# Altium PCB GPS.PcbDoc
Units mm, origin at the board's own origin, x right, y up, seen from the top; angles counter-clockwise.
Board outline 29 x 59 mm, 4 copper layers (Top Layer, MidLayer1, GroundPlane, Bottom Layer); 77 components, 84 nets, 473 pads, 152 vias.
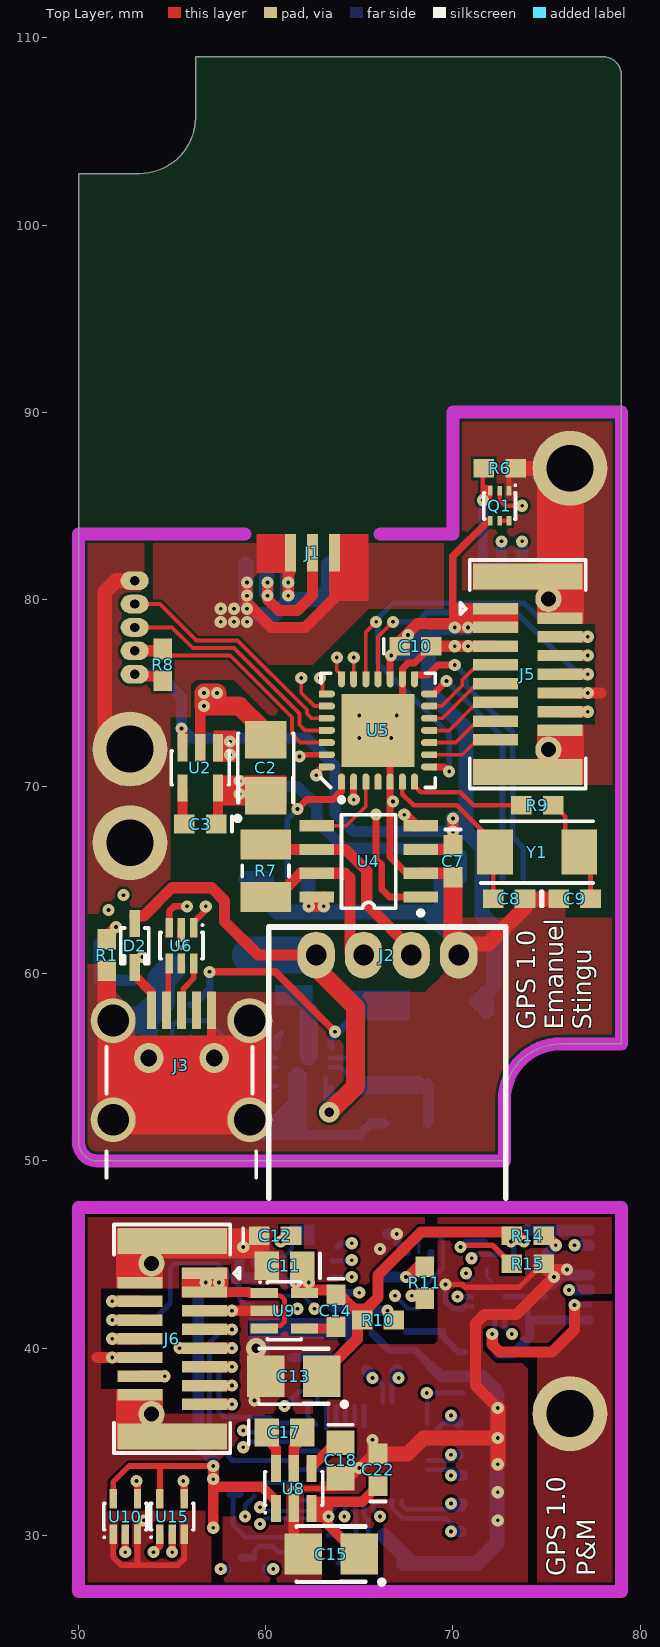
[diagram p0: Top Layer view]
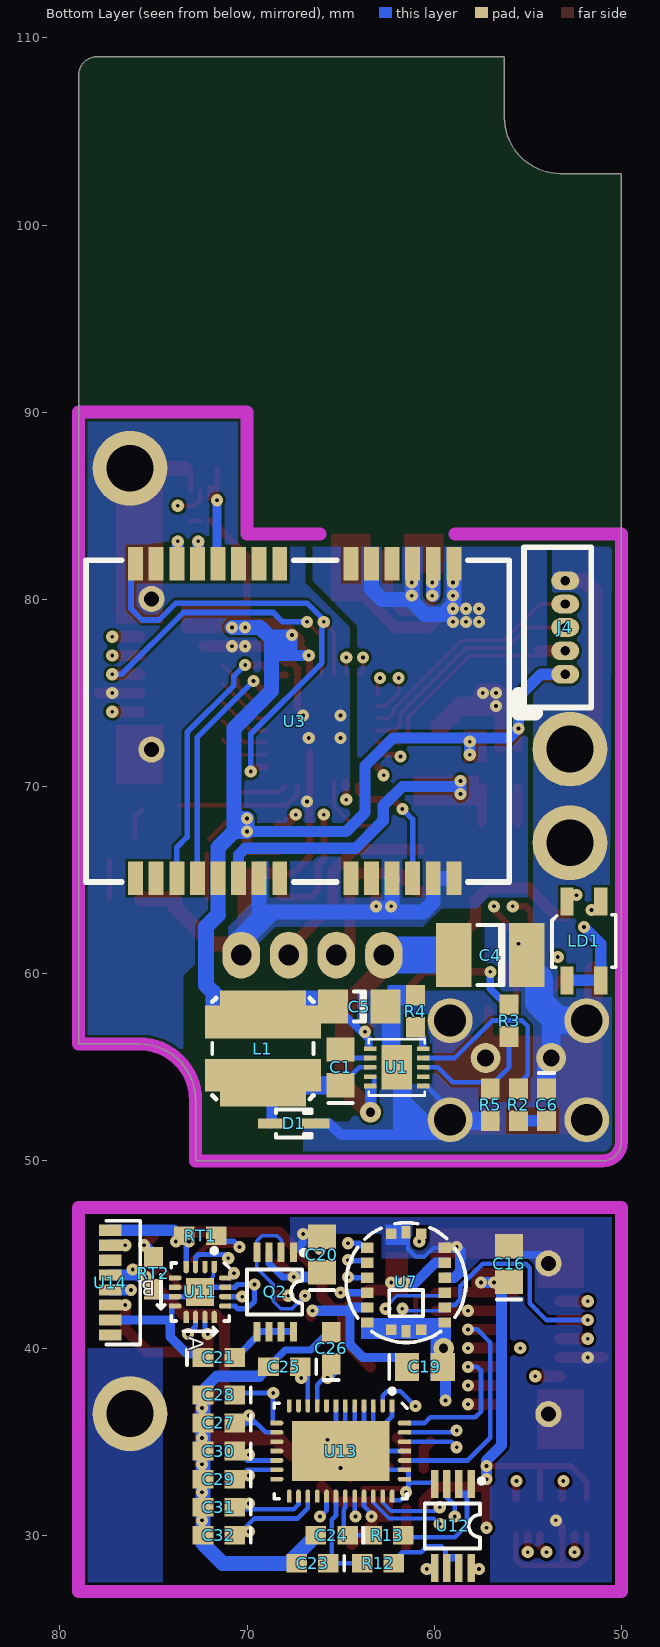
[diagram p1: Bottom Layer view, seen from below]
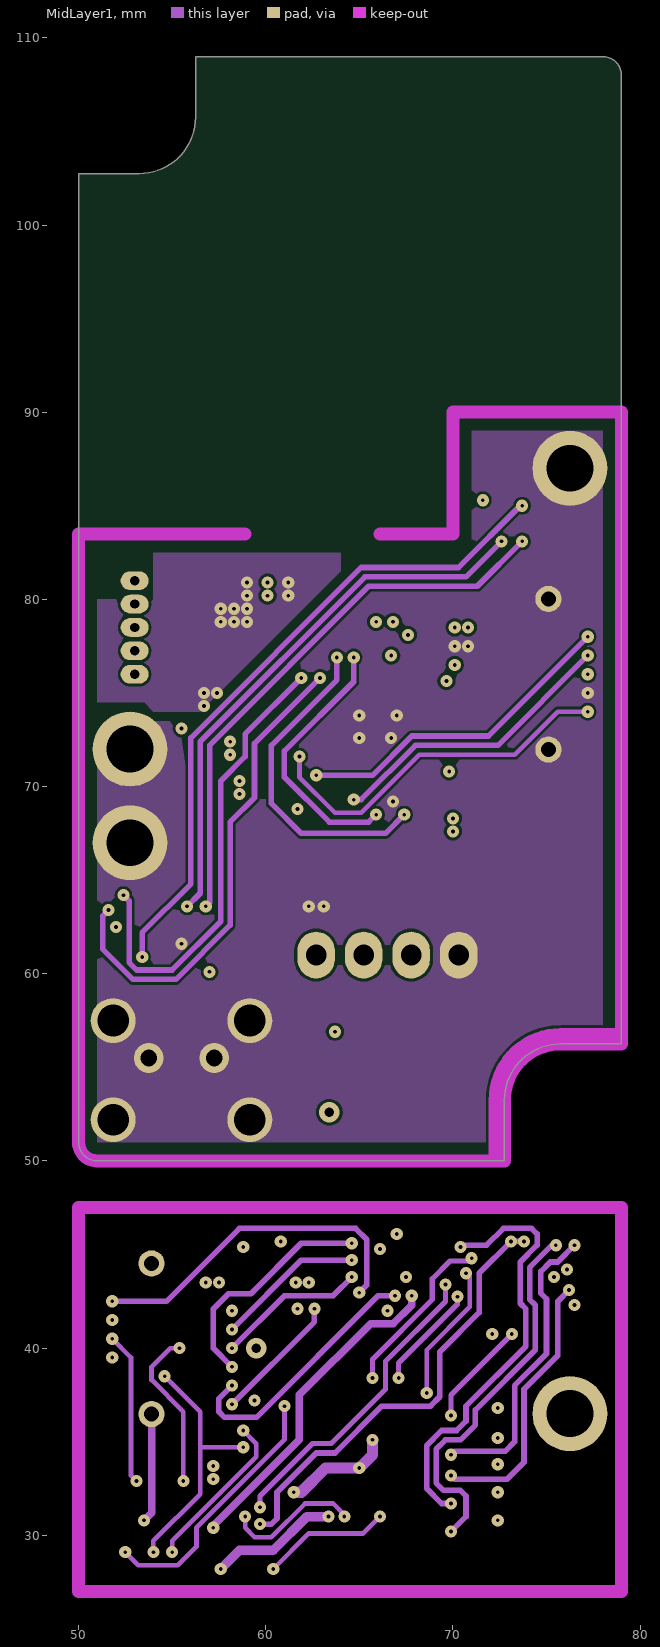
[diagram p2: MidLayer1]
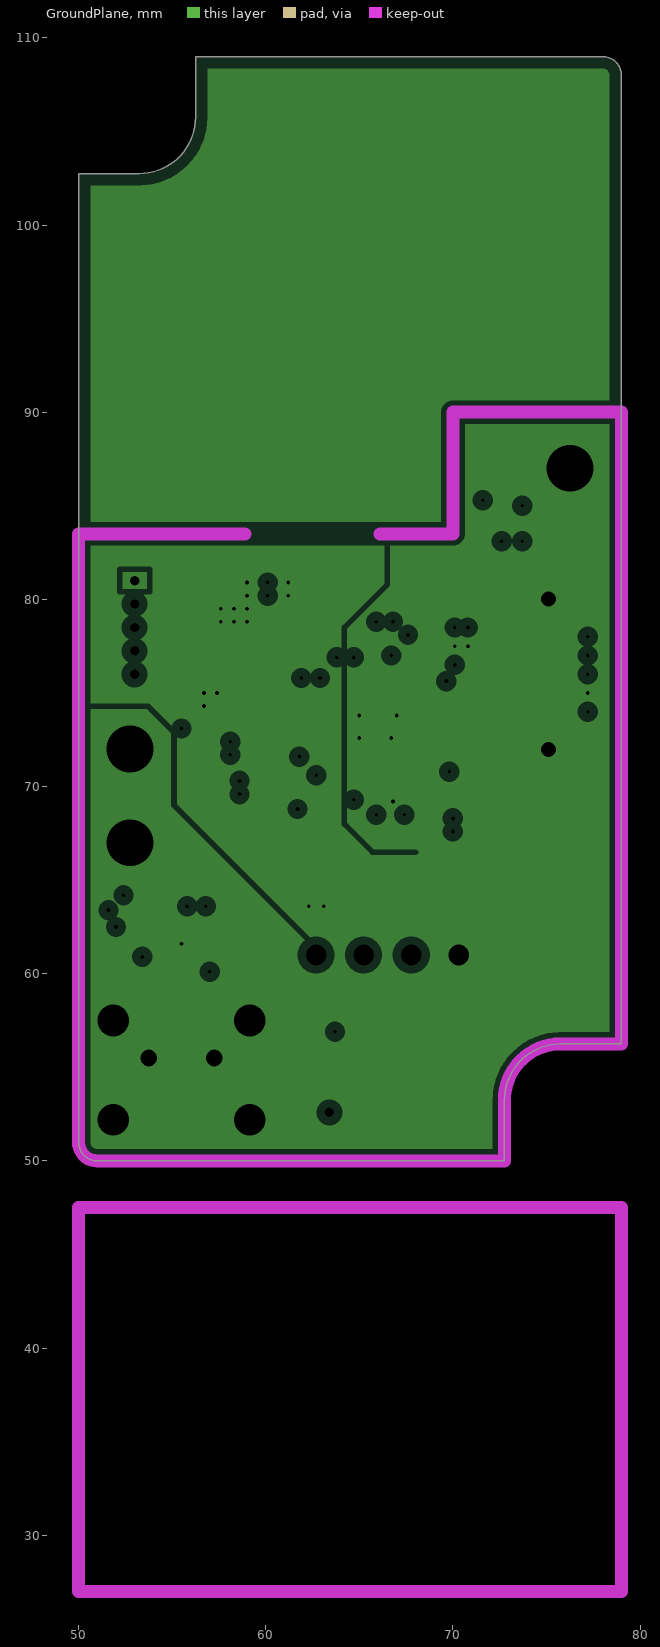
[diagram p3: GroundPlane, clearances drawn from the general rule]

## Layer stack, top to bottom
Top Layer: signal copper 0.036
Dielectric: prepreg 0.32, FR-4, Dk 4.8
MidLayer1: signal copper 0.036
Dielectric: core 0.32, FR-4, Dk 4.8
GroundPlane: plane copper 0.036, net GND
Dielectric: prepreg 0.32, FR-4, Dk 4.8
Bottom Layer: signal copper 0.036

## Board outline
50,51 50,102.75 53.25,102.75 ccw(c53.25,105.75) 56.25,105.75 56.25,109 78,109 cw(c78,108) 79,108 79,56.25 75.75,56.25 ccw(c75.75,53.25) 72.75,53.25 72.75,50 51,50 cw(c51,51)

## Design rules (kind name [scope] priority, off if disabled: settings)
Clearance [All] p1: gap=0.152
ComponentClearance [All] p1 off: gap=0.254 collisioncheckmode=3 verticalgap=0.254
HoleSize [All] p1: absolutevalues=TRUE maxlimit=4 minlimit=0.2 maxpercent=80.000 minpercent=20.000
PlaneClearance [All] p1: clearance=0.445
PlaneConnect [All] p1: planeconnectstyle=Direct reliefexpansion=0.508 reliefentries=4 reliefconductorwidth=0.254 reliefairgap=0.254
PolygonConnect [All] p1: connectstyle=Direct reliefconductorwidth=0.254 reliefentries=4 polygonreliefangle="90 Angle"
RoutingVias [All] p1: holewidth=0.2 width=0.65 viastyle="Through Hole" minholewidth=0.2 minwidth=0.65 maxholewidth=1.5 maxwidth=2.1
ShortCircuit ShortCircuit_Unconnected_Pins [IsPad and not InnetClass('All') vs IsPad and not InnetClass('All')] p1: allowed=TRUE
ShortCircuit [All] p2: allowed=FALSE
SolderMaskExpansion [All] p1: expansion=0.075
TestPointUsage [All] p1: valid=0 allowmultiple=FALSE
Testpoint [All] p1: side=15 testpointundercomponent=TRUE minsize=1.016 maxsize=2.54 preferedsize=1.524 minholesize=0 maxholesize=1.016 preferedholesize=0.813 testpointgrid=0.025 style=1023 order=0123456789
Width [All] p1: maxlimit=3 minlimit=0.152 preferedwidth=0.3 minimp=50.000000 maximp=50.000000 favimp=50.000000
14 further rules are at their usual default settings.

## Components (designator, comment, footprint, x,y, rotation, side; value= is the part's Value field where it differs from the comment)
C1 "GMK212BJ474KG-T" CC2012-0805 65,55 r90 bottom
C2 "TPSB106K016R0800" TC3528-1411 60,71 r90 top
C3 "GCM188R71H103KA37D" CC1608-0603 56.5,68 r180 top
C4 "C4532X7R1H475M" CC4532-1812 57,61 r0 bottom
C5 "ECJ-3YB1C226M" CC3216-1206 64,58.25 r0 bottom
C6 "" CC1608-0603 54,53 r270 bottom
C7 "UMK107BJ104KA-T" CC1608-0603 70,66 r270 top
C8 "Cap" CC1608-0603 73,64 r180 top
C9 "Cap" CC1608-0603 76.5,64 r0 top
C10 "UMK107BJ104KA-T" CC1608-0603 68,77.5 r0 top
C11 "GMK212BJ474KG-T" CC2012-0805 61,44.4 r180 top
C12 "UMK107BJ104KA-T" CC1608-0603 60.5,46 r0 top
C13 "TPSB106K016R0800" TC3528-1411 61.5,38.5 r180 top
C14 "GCM188R71H103KA37D" CC1608-0603 63.75,42 r270 top
C15 "TPSB106K016R0800" TC3528-1411 63.5,29 r180 top
C16 "ECJ-2FB1C475K" CC2012-0805 56,44.5 r90 bottom
C17 "GMK212BJ474KG-T" CC2012-0805 61,35.5 r0 top
C18 "ECJ-2FB1C475K" CC2012-0805 64,34 r270 top
C19 "GMK212BJ474KG-T" CC2012-0805 60.5,39 r180 bottom
C20 "ECJ-2FB1C475K" CC2012-0805 66,45 r90 bottom
C21 "UMK107BJ104KA-T" CC1608-0603 71.5,39.5 r180 bottom
C22 "UMK107BJ104KA-T" CC1608-0603 66,33.5 r90 top
C23 "" CC1608-0603 66.5,28.5 r0 bottom
C24 "" CC1608-0603 65.475,30 r0 bottom
C25 "UMK107BJ104KA-T" CC1608-0603 68,39 r0 bottom
C26 "UMK107BJ104KA-T" CC1608-0603 65.5,40 r90 bottom
C27 "UMK107BJ104KA-T" CC1608-0603 71.5,36 r0 bottom
C28 "UMK107BJ104KA-T" CC1608-0603 71.5,37.5 r0 bottom
C29 "UMK107BJ104KA-T" CC1608-0603 71.5,33 r0 bottom
C30 "UMK107BJ104KA-T" CC1608-0603 71.5,34.5 r0 bottom
C31 "UMK107BJ104KA-T" CC1608-0603 71.5,31.5 r0 bottom
C32 "UMK107BJ104KA-T" CC1608-0603 71.5,30 r0 bottom
D1 "BAT760-7" SOD-323 67.5,52 r180 bottom
D2 "SD107WS-7-F" SOD-323 53,61.5 r270 top
J1 "GeoHelix-P2" GPS_Antenna 62.5,82.5 r0 top locked
J2 "70553-0003" CON_CAN_Device-4 66.5,61 r0 top locked
J3 "UX60-MB-5S8" CON_USB_B_MINI 55.5,55.5 r0 top locked
J4 "53047-0510" CON_ISP 53,78.5 r90 bottom
J5 "91910-21115LF" CON_BB_7mm_15P_receptacle 74,76 r270 top
J6 "91930-21115LF" CON_BB_7mm_15P_header 55,40.5 r270 top
L1 "ELL-5GM180M" ELL5xM 69.15,56 r90 bottom
LD1 "LN2162C13TR" LED_DUAL 52,61.75 r270 bottom locked
Q1 "UP0431N00L" SSMini6-F1 72.5,85 r180 top
Q2 "IRF7507" Micro-8/P.65 68.5,43 r0 bottom
R1 "Res" CR1608-0603 51.5,61 r90 top
R2 "Res" CR1608-0603 55.5,53 r90 bottom
R3 "Res" CR1608-0603 56,57.5 r270 bottom
R4 "Res" CR1608-0603 61,58 r270 bottom
R5 "Res" CR1608-0603 57,53 r90 bottom
R6 "Res" CR1608-0603 72.5,87 r180 top
R7 "Res" CR3225-1210 60,65.5 r90 top
R8 "Res" CR1608-0603 54.5,76.5 r270 top
R9 "Res" CR1608-0603 74.5,69 r0 top
R10 "Res" CR1608-0603 66,41.5 r180 top
R11 "Res" CR1608-0603 68.5,43.5 r90 top
R12 "Res" CR1608-0603 63,28.5 r180 bottom
R13 "Res" CR1608-0603 62.5,30 r180 bottom
R14 "Res" CR1608-0603 74,46 r0 top
R15 "Res" CR1608-0603 74,44.5 r0 top
RT1 "ERT-J1VG103FA" CR1608-0603 72.5,46 r180 bottom
RT2 "ERT-J1VG103FA" CR1608-0603 75,44 r270 bottom
U1 "LT3480EDD" DFN3x3-10 62,55 r270 bottom
U2 "LT1761ES5-3" SO-G5/P.95 56.5,71 r180 top
U3 "LEA-4H" GPS_LEA_4H 78.5,73.5 r270 bottom locked
U4 "SN65HVD234D" SO-G8/E2.9 65.5,66 r90 top
U5 "PIC18LF2580-I/ML" QFN6X6-28 66,73 r0 top
U6 "USBUF02W6" SOT-323-6L 55.5,61.5 r180 top
U7 "SCP1000-D01" SCP1000 61.5,43.5 r90 bottom
U8 "LTC1928ES6-5" SO-G6/P.95 61.5,32.5 r0 top
U9 "LT1761ES5-3" SO-G5/P.95 61,42 r270 top
U10 "NC7SZ125M5X" SC70-5 52.5,31 r0 top
U11 "HMC1052L" "QFN3X3-16 - HMC1052L" 72.5,43 r0 bottom
U12 "AD8646ARMZ" MSOP-8/P.65 59,30.5 r0 bottom
U13 "LTC2445" QFN5X7-38 65,34.5 r0 bottom
U14 "HMC1051ZL" HMC1051ZL 77.5,43.5 r90 bottom
U15 "NC7SZ125M5X" SC70-5 55,31 r0 top
Y1 "CS10-16.000MABJ-UT" CS10 74.5,66.5 r0 top

## Footprints (in the part's own frame and the unit in brackets; to place one, negate y for a bottom-side part, rotate by r counter-clockwise, add the part's x,y. Pads: shape width x height; smd on the part's side, far side on the other; paste and mask are expansions set on the pad)
CC1608-0603 [mm] "Chip Capacitor; Body 1.6 x 0.8 mm (LxW typ)"
  rect 1.1x1 smd: 1(-0.85,0) 2(0.85,0)
  silkscreen extent -1.7,-0.4 -1.7,0.4
CC2012-0805 [mm] "Chip Capacitor; Body 2.0 x 1.2 mm (LxW typ)"
  rect 1.3x1.5 smd: 1(-0.95,0) 2(0.95,0)
  silkscreen extent -1.9,-0.65 -1.9,0.65
CC3216-1206 [mm] "Chip Capacitor; Body 3.2 x 1.6 mm (LxW typ)"
  rect 1.6x1.8 smd: 1(-1.4,0) 2(1.4,0)
  silkscreen extent -0.3,-0.8 0.3,0.8
CC4532-1812 [mm] "Chip Capacitor; Body 4.5 x 3.2 mm (LxW typ)"
  rect 1.9x3.4 smd: 1(-1.95,0) 2(1.95,0)
  silkscreen extent -0.7,-1.6 0.7,1.6
CON_BB_7mm_15P_header [mm] "Board to Board Connector GPS module (Header)"
  rect 0.61x2.41 smd: 1(-3.5,1.72) 2(-3,-1.72) 3(-2.5,1.72) 4(-2,-1.72) 5(-1.5,1.72) 6(-1,-1.72) 7(-0.5,1.72) 8(0,-1.72) 9(0.5,1.72) 10(1,-1.72) 11(1.5,1.72) 12(2,-1.72) 13(2.5,1.72) 14(3,-1.72) 15(3.5,1.72)
  rect 1.4x5.85 smd: 2(-5.22,0) 14(5.22,0)
  round 1.4 hole 0.8: 2(-4.026,-1.1) 14(4.026,-1.1)
  silkscreen extent -6.1,-3.1 6.1,3.6
CON_BB_7mm_15P_receptacle [mm] "Board to Board Connector GPS module (Receptacle)"
  rect 0.61x2.41 smd: 1(-3.5,-1.72) 2(-3,1.72) 3(-2.5,-1.72) 4(-2,1.72) 5(-1.5,-1.72) 6(-1,1.72) 7(-0.5,-1.72) 8(0,1.72) 9(0.5,-1.72) 10(1,1.72) 11(1.5,-1.72) 12(2,1.72) 13(2.5,-1.72) 14(3,1.72) 15(3.5,-1.72)
  rect 1.4x5.85 smd: 2(-5.22,0) 14(5.22,0)
  round 1.4 hole 0.8: 2(-4.026,1.1) 14(4.026,1.1)
  silkscreen extent -6.1,-3.6 6.1,3.1
CON_CAN_Device-4 [mm] "4-pin CAN connector - device side"
  oval 2x2.5 hole 1.1: 1(-3.81,0) 2(-1.27,0) 3(1.27,0) 4(3.81,0)
  silkscreen extent -6.33,-13 6.33,1.5
CON_ISP [mm] "Microchip ISP Connector"
  oval 1x1.5 hole 0.5: 1(-2.5,0) 2(-1.25,0) 3(0,0) 4(1.25,0) 5(2.5,0)
  silkscreen extent -4.57,-1.4 4.28,2.5
CON_USB_B_MINI [mm] "Mini USB Type B Connector"
  round 2.4 hole 1.7: 0(-3.65,-3.3) 0(-3.65,2) 0(3.65,-3.3) 0(3.65,2)
  round 1.6 hole 0.9: 0(-1.75,0) 0(1.75,0)
  rect 0.5x2 smd: 1(-1.6,2.55) 2(-0.8,2.55) 3(0,2.55) 4(0.8,2.55) 5(1.6,2.55)
  silkscreen extent -4,-6.4 4,0.6
CR1608-0603 [mm] "Chip Resistor; Body 1.6 x 0.8 mm (LxW typ)"
  rect 1.1x1 smd: 1(-0.85,0) 2(0.85,0)
CR3225-1210 [mm] "Chip Resistor; Body 3.2 x 2.5 mm (LxW typ)"
  rect 1.6x2.7 smd: 1(-1.4,0) 2(1.4,0)
  silkscreen extent -0.3,-1.25 0.3,1.25
CS10 [mm] "Crystal"
  rect 1.9x2.4 smd: 1(-2.25,0) 2(2.25,0)
  silkscreen extent -3,-1.65 3,1.65
DFN3x3-10 [mm]
  rect 0.25x0.675 smd: 1(-1,-1.412) 2(-0.5,-1.412) 3(0,-1.412) 4(0.5,-1.412) 5(1,-1.412) 6(1,1.412) 7(0.5,1.412) 8(0,1.412) 9(-0.5,1.412) 10(-1,1.412)
  rect 2.38x1.65 smd: 11(0,0)
  silkscreen extent -1.5,-1.5 1.5,1.5
ELL5xM [mm] "Coil footprint"
  rect 2.55x4.6 smd: 1(-1.825,0) 2(1.825,0)
  rect 1.75x1 smd: 1(-1.425,-2.6) 1(-1.425,2.6) 2(1.425,-2.6) 2(1.425,2.6)
  silkscreen extent -2.7,-2.7 2.7,2.7
GPS_Antenna [mm] "GPS Helical Antenna"
  rect 0.6x2 smd: 1(-1.17,0) 2(0,0) 3(1.17,0)
GPS_LEA_4H [mm] "GPS Macrocomponent"
  rect 1.8x0.8 smd: 1(8.4,2.55) 2(8.4,3.65) 3(8.4,4.75) 4(8.4,5.85) 5(8.4,6.95) 6(8.4,8.05) 7(8.4,9.15) 8(8.4,10.25) 9(8.4,14.05) 10(8.4,15.15) 11(8.4,16.25) 12(8.4,17.35) 13(8.4,18.45) 14(8.4,19.55) 15(-8.4,19.55) 16(-8.4,18.45) 17(-8.4,17.35) 18(-8.4,16.25) 19(-8.4,15.15) 20(-8.4,14.05) 21(-8.4,10.25) 22(-8.4,9.15) 23(-8.4,8.05) 24(-8.4,6.95) 25(-8.4,5.85) 26(-8.4,4.75) 27(-8.4,3.65) 28(-8.4,2.55)
  silkscreen extent -8.6,-0.1 8.6,22.5
HMC1051ZL [mm] "Vertical Magnetic Sensor"
  rect 0.6x1.2 smd: 1(-2.8,-0.2) 2(-2,-0.2) 3(-1.2,-0.2) 4(-0.4,-0.2) 5(0.4,-0.2) 6(1.2,-0.2) 7(2,-0.2) 8(2.8,-0.2)
  silkscreen extent -3.3,-1.8 3.3,0
LED_DUAL [mm] "Dual-Color SMD LED"
  rect 1.5x0.7 smd: 1(-2.1,-0.9) 2(2.1,-0.9) 3(2.1,0.9) 4(-2.1,0.9)
  silkscreen extent -1.4,-1.7 1.4,1.7
Micro-8/P.65 [mm] "MSOP, Plastic; 8 Leads; Pitch 0.65 mm"
  rect 0.38x1.04 smd: 1(-0.975,-2.12) 2(-0.325,-2.12) 3(0.325,-2.12) 4(0.975,-2.12) 5(0.975,2.12) 6(0.325,2.12) 7(-0.325,2.12) 8(-0.975,2.12)
  silkscreen extent -1.65,-2.22 1.5,1.2
MSOP-8/P.65 [mm] "MSOP, Plastic; 8 Leads; Pitch 0.65 mm"
  rect 0.4x1.5 smd: 1(-0.975,-2.25) 2(-0.325,-2.25) 3(0.325,-2.25) 4(0.975,-2.25) 5(0.975,2.25) 6(0.325,2.25) 7(-0.325,2.25) 8(-0.975,2.25)
  silkscreen extent -1.65,-2.52 1.5,1.2
"QFN3X3-16 - HMC1052L" [mm] "Quad Flat No Lead, Plastic; 16 Terminals; Body 3 x 3 mm; Pitch 0.5 mm"
  rect 0.28x0.28 smd: 1(-0.75,-1.515) 2(-0.25,-1.515) 3(0.25,-1.515) 4(0.75,-1.515) 5(1.515,-0.75) 6(1.515,-0.25) 7(1.515,0.25) 8(1.515,0.75) 9(0.75,1.515) 10(0.25,1.515) 11(-0.25,1.515) 12(-0.75,1.515) 13(-1.515,0.75) 14(-1.515,0.25) 15(-1.515,-0.25) 16(-1.515,-0.75)
  oval 0.28x0.66 smd: 1(-0.75,-1.325) 2(-0.25,-1.325) 3(0.25,-1.325) 4(0.75,-1.325) 9(0.75,1.325) 10(0.25,1.325) 11(-0.25,1.325) 12(-0.75,1.325)
  oval 0.66x0.28 smd: 5(1.325,-0.75) 6(1.325,-0.25) 7(1.325,0.25) 8(1.325,0.75) 13(-1.325,0.75) 14(-1.325,0.25) 15(-1.325,-0.25) 16(-1.325,-0.75)
  rect 1.5x1.5 smd: 17(0,0)
  silkscreen extent -1.55,-2.33 2.3,2.3
QFN5X7-38 [mm] "Quad Flat No Lead; 38 Terminals; Body 5 x 7 mm; Pitch 0.5 mm"
  rect 0.25x0.25 smd: 1(-2.75,-2.625) 2(-2.25,-2.625) 3(-1.75,-2.625) 4(-1.25,-2.625) 5(-0.75,-2.625) 6(-0.25,-2.625) 7(0.25,-2.625) 8(0.75,-2.625) 9(1.25,-2.625) 10(1.75,-2.625) 11(2.25,-2.625) 12(2.75,-2.625) 13(3.625,-1.5) 14(3.625,-1) 15(3.625,-0.5) 16(3.625,0) 17(3.625,0.5) 18(3.625,1) 19(3.625,1.5) 20(2.75,2.625) 21(2.25,2.625) 22(1.75,2.625) 23(1.25,2.625) 24(0.75,2.625) 25(0.25,2.625) 26(-0.25,2.625) 27(-0.75,2.625) 28(-1.25,2.625) 29(-1.75,2.625) 30(-2.25,2.625) 31(-2.75,2.625) 32(-3.625,1.5) 33(-3.625,1) 34(-3.625,0.5) 35(-3.625,0) 36(-3.625,-0.5) 37(-3.625,-1) 38(-3.625,-1.5)
  oval 0.25x0.7 smd: 1(-2.75,-2.4) 2(-2.25,-2.4) 3(-1.75,-2.4) 4(-1.25,-2.4) 5(-0.75,-2.4) 6(-0.25,-2.4) 7(0.25,-2.4) 8(0.75,-2.4) 9(1.25,-2.4) 10(1.75,-2.4) 11(2.25,-2.4) 12(2.75,-2.4) 20(2.75,2.4) 21(2.25,2.4) 22(1.75,2.4) 23(1.25,2.4) 24(0.75,2.4) 25(0.25,2.4) 26(-0.25,2.4) 27(-0.75,2.4) 28(-1.25,2.4) 29(-1.75,2.4) 30(-2.25,2.4) 31(-2.75,2.4)
  oval 0.7x0.25 smd: 13(3.4,-1.5) 14(3.4,-1) 15(3.4,-0.5) 16(3.4,0) 17(3.4,0.5) 18(3.4,1) 19(3.4,1.5) 32(-3.4,1.5) 33(-3.4,1) 34(-3.4,0.5) 35(-3.4,0) 36(-3.4,-0.5) 37(-3.4,-1) 38(-3.4,-1.5)
  rect 5.2x3.2 smd: 39(0,0)
  silkscreen extent -3.55,-3.33 3.55,2.55
QFN6X6-28 [mm] "Quad Flat No Lead, Plastic, Punch; 28 Terminals; Body 6 x 6 mm; Pitch 0.65 mm"
  rect 0.37x0.37 smd: 1(-1.95,-2.97) 2(-1.3,-2.97) 3(-0.65,-2.97) 4(0,-2.97) 5(0.65,-2.97) 6(1.3,-2.97) 7(1.95,-2.97) 8(2.97,-1.95) 9(2.97,-1.3) 10(2.97,-0.65) 11(2.97,0) 12(2.97,0.65) 13(2.97,1.3) 14(2.97,1.95) 15(1.95,2.97) 16(1.3,2.97) 17(0.65,2.97) 18(0,2.97) 19(-0.65,2.97) 20(-1.3,2.97) 21(-1.95,2.97) 22(-2.97,1.95) 23(-2.97,1.3) 24(-2.97,0.65) 25(-2.97,0) 26(-2.97,-0.65) 27(-2.97,-1.3) 28(-2.97,-1.95)
  oval 0.37x0.86 smd: 1(-1.95,-2.725) 2(-1.3,-2.725) 3(-0.65,-2.725) 4(0,-2.725) 5(0.65,-2.725) 6(1.3,-2.725) 7(1.95,-2.725) 15(1.95,2.725) 16(1.3,2.725) 17(0.65,2.725) 18(0,2.725) 19(-0.65,2.725) 20(-1.3,2.725) 21(-1.95,2.725)
  oval 0.86x0.37 smd: 8(2.725,-1.95) 9(2.725,-1.3) 10(2.725,-0.65) 11(2.725,0) 12(2.725,0.65) 13(2.725,1.3) 14(2.725,1.95) 22(-2.725,1.95) 23(-2.725,1.3) 24(-2.725,0.65) 25(-2.725,0) 26(-2.725,-0.65) 27(-2.725,-1.3) 28(-2.725,-1.95)
  rect 3.9x3.9 smd: 29(0,0)
  silkscreen extent -3.05,-3.83 3.05,3.05
SC70-5 [mm] "SC-70; 5 Leads"
  rect 0.4x1.05 smd: 1(-0.65,-0.95) 2(0,-0.95) 3(0.65,-0.95) 4(0.65,0.95) 5(-0.65,0.95)
  silkscreen extent -1.17,-1.15 1.15,0.7
SCP1000 [mm] "Pressure Sensor"
  rect 0.67x0.47 smd: 0(-2.595,0) 0(2.695,0)
  rect 0.55x0.67 smd: 1(-2.135,-2.07) 2(-1.335,-2.07) 3(-0.535,-2.07) 4(0.265,-2.07) 5(1.065,-2.07) 6(1.865,-2.07) 9(1.865,2.07) 10(1.065,2.07) 11(0.265,2.07) 12(-0.535,2.07) 13(-1.335,2.07) 14(-2.135,2.07)
  rect 0.57x0.57 smd: 7(2.615,-0.8) 8(2.615,0.8) 15(-2.515,0.8) 16(-2.515,-0.8)
  silkscreen extent -3.2,-3.2 3.2,3.2
SO-G5/P.95 [mm] "SOT-23/SC-74A; 5 Leads; Body 3.1 x 3 mm, inc. leads (LxW max)"
  rect 0.55x1.45 smd: 1(-0.95,-1.075) 2(0,-1.075) 3(0.95,-1.075) 4(0.95,1.075) 5(-0.95,1.075)
  silkscreen extent -1.58,-1.35 1.55,0.9
SO-G6/P.95 [mm] "SOT-457/SC-74; 6 Leads; Body 3.1 x 3 mm, inc. leads (LxW max)"
  rect 0.55x1.45 smd: 1(-0.95,-1.075) 2(0,-1.075) 3(0.95,-1.075) 4(0.95,1.075) 5(0,1.075) 6(-0.95,1.075)
  silkscreen extent -1.57,-1.35 1.55,0.9
SO-G8/E2.9 [mm] "Small Outline; 8 Leads; Body Width 3.9 mm; Pitch 1.27 mm"
  rect 0.6x1.85 smd: 1(-1.905,-2.775) 2(-0.635,-2.775) 3(0.635,-2.775) 4(1.905,-2.775) 5(1.905,2.775) 6(0.635,2.775) 7(-0.635,2.775) 8(-1.905,2.775)
  silkscreen extent -2.88,-2.9 2.5,1.45
SOD-323 [mm] "SOD-323/SC-76; 2 Leads; Body 1.7 x 1.3 mm, (LxW)"
  rect 1.45x0.55 smd: 1(1.175,0) 2(-1.175,0)
  silkscreen extent -0.95,-0.75 0.95,0.75
SOT-323-6L [mm] "SOT-323-6L"
  rect 0.4x1.05 smd: 1(-0.65,-0.95) 2(0,-0.95) 3(0.65,-0.95) 4(0.65,0.95) 5(0,0.95) 6(-0.65,0.95)
  silkscreen extent -1.17,-1.15 1.15,0.7
SSMini6-F1 [mm] "SMD Dual Transistor 0.5 mm pitch"
  rect 0.25x0.5 smd: 1(-0.5,-0.8) 2(0,-0.8) 3(0.5,-0.8) 4(0.5,0.8) 5(0,0.8) 6(-0.5,0.8)
  silkscreen extent -0.87,-1.15 0.85,0.7
TC3528-1411 [mm] "Capacitor, SM Tantalum; Body 3.5 x 2.8 mm (LxW typ)"
  rect 2x2.2 smd: 1(-1.5,0) 2(1.5,0)
  silkscreen extent -2.82,-1.5 1.85,1.62

## Part data
C1 C3 C4 C5 C6 C7 C10 C11 C12 C14 C16 C17 C18 C19 C20 C21 C22 C23 C24 C25 C26 C27 C28 C29 C30 C31 C32: library part Cap, "Capacitor"
C2 C13 C15: library part "Cap Pol", "Polarized Capacitor (Surface Mount)"
C8 C9: "Capacitor"
D1: library part SD107WS, "Schottky Diode 30V 1mA SOD323"
D2: library part SD107WS, "Schottky Diode 30V 100mA SOD323"
J1: library part GPS_ANT, "GPS Helical antenna"
J2: library part CON_CAN_DEVICE, "4 pin CAN Connector 2.54mm pitch"
J3: library part CON_USB_Type_B_Mini, "CONN MINI USB TYPE B Receptacle"
J4: library part CON_ISP_Header_5p_1.25mm, "6 pin header - 1.25mm pitch"
J5: library part CON_MAG_Baseboard, "CONN Magnetic 15 pin Receptacle (Baseboard side)"
J6: library part CON_MAG_MAG_PRES, "CONN Magnetic_Pressure 15 pin Header"
L1: "Inductor 18uH 600mA Panasonic"
LD1: library part LED_Bicolor, "Bicolor LED"
Q1: "Pre-biased NPN+PNP Bipolar Transistors"
Q2: "HEXFET Power MOSFET"
R1 R2 R3 R4 R5 R6 R7 R8 R9 R10 R11 R12 R13 R14 R15: "Resistor"
RT1 RT2: library part "Res Thermal", "Thermistor"
U1: "SMPS Regulator 2A"
U2 U9: library part LT1761ES5-2.5, "LDO low-noise 2.5V"
U3: "GPS Receiver"
U4: "3.3V CAN Transceiver"
U5: library part PIC18F2580-I/ML, "8 bit CAN MCU"
U6: "USB EMI Filter"
U7: "Pressure Sensor SPI Interface"
U8: "Positive Chargepump 5V"
U10 U15: "1-Bit Low Power Buffer"
U11: "2-Axis Magnetic Sensor"
U12: "Precision Low Noise CMOS Rail-to-Rail Operational Amplifier"
U13: "24 bit ADC"
U14: "1-Axis Magnetic Sensor"
Y1: library part CS10, "Crystal Oscillator"

## Free pads (board coordinates)
  round 4 hole 2.5: 0(52.75,67) 0(52.75,72) 0(76.25,36.5) 0(76.25,87)

## Via types
v1: diameter 0.65, hole 0.2, Top Layer to Bottom Layer, tented both sides, 81 vias
v2: diameter 0.65, hole 0.2, Top Layer to Bottom Layer, tented bottom, 36 vias
v3: diameter 0.65, hole 0.2, Top Layer to Bottom Layer, tented top, 25 vias
v4: diameter 0.65, hole 0.2, Top Layer to Bottom Layer, 8 vias
v5: diameter 1.1, hole 0.5, Top Layer to Bottom Layer, 2 vias

## Nets (pads, with @x,y where several pads share a name; then routed paths per layer and width w, separated by ;. In a path a pad name is that pad's centre, name@x,y a point inside that pad or via, vN(x,y) a via of type N, cw(c..) or ccw(c..) an arc to the next point about the centre after c; other vN are vias at no path point)
ADC_BUSY: J5.8 U5.18 | length 16.6
  Top Layer w0.2: U5.18@66,75.97 66,78 v1(66.8,78.8)
  Top Layer w0.6: J5.8 v2(77.2,76)
  Bottom Layer w0.3: v1(66.8,78.8) 68.1,78.8 68.6,79.3 73.4,79.3 76.7,76 v2(77.2,76)
ADC_SDO: U13.37 U15.2 | length 12.1
  Top Layer w0.4: v1(55,29.1) U15.2
  MidLayer1 w0.25: v1(55,29.1) 55,29.7 59.5,34.2 59.5,34.9 v1(58.8,35.6)
  Bottom Layer w0.25: v1@58.9,35.5 U13.37@61.375,35.5
AVCC3V: C11.1 C13.1 C14.1 R10.2 R14.1 RT1.1 U7.5 U9.5 U11.4 U13.29 U14.8 | length 54.1
  Top Layer w0.55: R14.1@73.5,46 v4(73.8,45.7)
  Top Layer w0.6: U9.5@62.2,43.1 C14.1@63.5,43.1 ; C13.1@63.4,39 64.9,40.5 64.9,41.9 C14.1@63.95,42.85 ; 64.704,42.096 65.396,42.096 66,42.7 66,43.9 68.3,46.2 R14.1@73.3,46.2
  MidLayer1 w0.3: v1(59.7,30.6) 60.3,30.6 60.6,30.9 60.6,32.3 62.7,34.4 63.7,34.4 66.2,36.9 68.8,36.9 69.3,37.4 69.3,39.8 71.4,41.9 71.4,44 v4(73.1,45.7) v4(73.8,45.7)
  Bottom Layer w0.2: v1(59.7,30.6) 60,30.9 62.4,30.9 63.25,31.75 U13.29@63.25,31.875
  Bottom Layer w0.28: U11.4@73.25,44.515 RT1.1@73.25,45.9
  Bottom Layer w0.55: U7.5 59.935,44.565 61,43.5 v2(62.3,43.5)
  Bottom Layer w0.6: RT1.1@73.6,46 73.9,46.3 U14.8
  other v2: 61.6,43.5
AVCC5V: C15.1 C22.1 U8.3 U12.8 U13.28 | length 14.8
  Top Layer w0.55: U8.3@62.5,31 v1(63.35,31) 63.3,30.6 C15.1@64.4,29.5 ; U8.3@62.5,31.8 65.15,31.8 C22.1
  MidLayer1 w0.5: v3(57.6,28.2) 58.6,29.2 60.4,29.2 62.2,31 v1(63.35,31)
  Bottom Layer w0.25: v1@63.3,31.1 63.75,31.55 U13.28@63.75,31.875
  Bottom Layer w0.55: v3(57.6,28.2) U12.8@57.9,28.2
BUSY: U10.2 U13.2 | length 17.4
  Top Layer w0.4: v1(52.5,29.1) U10.2
  MidLayer1 w0.25: v1(52.5,29.1) 53.2,28.4 55.3,28.4 56.3,29.4 56.3,30.4 61,35.1 v1(61,36.9)
  Bottom Layer w0.25: v1(61,36.9) 61.8,37.7 62.5,37.7 62.75,37.45 U13.2@62.75,37.125
C\S\_\A\D\C\: J5.12 U5.27 | length 22.1
  Top Layer w0.3: v1@61.9,71.7 U5.27@63.03,71.7
  Top Layer w0.6: J5.12 v2(77.2,74)
  MidLayer1 w0.25: v1(61.8,71.6) 61.8,70.5 63.7,68.6 65.1,68.6 68.2,71.7 73.3,71.7 75.6,74 v2(77.2,74)
C\S\_\P\R\: J5.4 U5.28 | length 19.6
  Top Layer w0.37: v1(62.7,70.6) 62.7,70.72 U5.28@63.03,71.05
  Top Layer w0.6: J5.4 v2(77.2,78)
  MidLayer1 w0.3: v1(62.7,70.6) 65.7,70.6 67.8,72.7 71.9,72.7 v2(77.2,78)
CAN_EN: U4.5 U5.3 | length 4.4
  Top Layer w0.2: U4.5 64.305,67.905 65.35,68.95 U5.3@65.35,70.275
CAN_RX: U4.4 U5.21 | length 19.6
  Top Layer w0.2: v1(63.8,76.9) 63.8,76.2 64.03,75.97 U5.21@64.05,75.97
  Top Layer w0.6: v1(67.4,68.5) U4.4@67.907,67.993 ; U4.4@67.907,67.903 U4.4
  MidLayer1 w0.3: v1(63.8,76.9) 63.8,75.7 60.3,72.2 60.3,69.1 61.9,67.5 66.4,67.5 v1(67.4,68.5)
CAN_TX: U4.1 U5.20 | length 21.3
  Top Layer w0.2: U5.20@64.7,75.97 v1(64.7,76.9)
  Top Layer w0.37: v1(65.9,68.5) 65.9,66.1 66.2,65.8 66.2,64.5 66.605,64.095 U4.1
  MidLayer1 w0.3: v1(64.7,76.9) 64.7,75.6 61,71.9 61,70.5 63.4,68.1 65.5,68.1 v1(65.9,68.5)
DRDY_PR: J5.15 U5.9 | length 2.7
  Top Layer w0.2: U5.9@68.97,71.7 70.5,71.7 J5.15@71.3,72.5
GND: C2.2 C4.1 C5.1 C6.1 C7.2 C8.1 C9.1 C10.2 D1.1 J1.1 J1.3 J2.4 J3.0 J3.5 J4.5 J5.2 J5.5 J5.10 J5.14 pad.0@52.75,67 pad.0@52.75,72 pad.0@76.25,87 Q1.1 R1.1 R4.1 R5.1 R6.1 U1.6 U1.11 U2.2 U3.7 U3.11 U3.13 U3.14 U3.15 U3.17 U3.19 U4.2 U4.8 U5.5 U5.16 U5.29 U6.2 | length 156.5
  Top Layer w0.25: Q1.1 R6.1@73,87
  Top Layer w0.37: U5.29@66.65,71.85 66.65,66.25 67.535,65.365 U4.2 ; U5.29@67.3,74.2 U5.16@67.3,75.725 ; U5.16@67.3,75.97 67.3,76.3 67.6,76.6 67.95,76.6 C10.2
  Top Layer w0.4: v3(55.5,61.6) U6.2
  Top Layer w0.5: J3.0@57.1,55.65 J3.5
  Top Layer w0.55: U2.2 v1@56.5,74.3
  Top Layer w0.6: v1(59,80.9) 59,79.8 60.3,78.5 62.1,78.5 63.67,80.07 J1.3 ; v1(61.2,80.2) 61.2,81.4 61.33,81.53 J1.1 ; U4.8@62.3,64.1 v2(62.3,63.6) v2(63.1,63.6) U4.8@63.1,64.1 ; U4.2 C7.2@70.065,65.365 ; C10.2 J5.5 ; J5.10 v2(77.2,75) 77.9,75
  Top Layer w0.8: pad.0@51.4,72.2 51.4,80.4 52,81 J4.5 ; J2.4@70,61.6 71.9,61.6 73.85,63.55 C8.1 C9.1 ; R6.1 pad.0@75.8,87
  Top Layer w1: J3.0@51.5,57.9 R1.1 ; J3.0@51.85,57.5 51.85,52.2 59.15,52.2 J3.0@59.15,57.5 ; 51.95,55.5 59.15,55.5 ; 57.4,74.3 v1(57.4,75) v1(56.7,75) v1(56.7,74.3) 58.6,74.3 C2.2@59.7,73.2 ; J2.4@70,61.31 C7.2
  Bottom Layer w0.25: J3.0@59.2,52.8 60.4,54 U1.6
  Bottom Layer w0.55: J3.0@59.2,51.4 65,51.4 65.6,52 D1.1
  Bottom Layer w0.6: v2@62.35,63.6 v2(63.1,63.6)
  Bottom Layer w0.8: U3.14 U3.13 60.05,63.85 60.6,63.3 69.35,63.3 ; U3.15 58.95,79.75 59.5,79.2 60.5,79.2 61.15,79.85 U3.17 ; v1@61.15,80 62.8,80 63.35,80.55 U3.19 ; v2@62.25,63.35 U3.11 ; 68.6,63.3 J2.4@70.5,61.4 ; 69.1,63.3 J2.4@70.5,61.9 ; 69.35,62.55 U3.7
  Bottom Layer w1: J3.0@53.75,55.5 53.75,57.655 ; C6.1 J3.0@54,55.6 ; R5.1 J3.0@58.55,52.15 ; J3.0@59.5,52 61.7,52 ; 60.4,51.8 61.7,53.1 ; 61.7,51.7 U1.11@61.7,54.5 ; U1.11@62.3,55.6 C5.1@62.3,58
  Bottom Layer w1.5: J3.0@51.85,57.5 53.4,57.5 54.4,58.5 54.4,59.7 C4.1@55,60.3
  other v1: 66.8,69.2 70.1,77.5 57.6,78.8 58.3,78.8 59,78.8 57.6,79.5 58.3,79.5 59,79.5 59,80.2 61.2,80.9
  other v2: 65,72.6 66.7,72.6 65,73.8 67,73.8 70.8,77.5
LED_GREEN: LD1.4 U5.22 | length 27
  Top Layer w0.2: v1(62.9,75.8) 63.03,75.57 U5.22@63.03,74.95
  MidLayer1 w0.3: v3(51.6,63.4) 51.3,63.1 51.3,61.3 52.9,59.7 55.2,59.7 58.1,62.6 58.1,68.1 59.4,69.4 59.4,72.3 v1(62.9,75.8)
LED_RED: LD1.1 U5.23 | length 26.9
  Top Layer w0.2: v1(61.9,75.8) 61.9,75 62.6,74.3 U5.23@63.03,74.3
  MidLayer1 w0.3: v3(52.4,64.2) 52.7,63.9 52.7,60.6 53.1,60.2 55,60.2 57.6,62.8 57.6,70.3 58.9,71.6 58.9,72.8 v1(61.9,75.8)
M\C\L\R\: J4.2 R8.1 U5.26 | length 12.7
  Top Layer w0.2: R8.1@54.2,77 58.1,77 61.4,73.7 61.4,72.8 61.85,72.35 U5.26@63.03,72.35
  Top Layer w0.6: J4.2 R8.1@54.4,77.25
M\C\S\_\A\D\C\: J6.12 U13.36 U15.1 | length 18.6
  Top Layer w0.4: v1(54,29.1) 54.35,29.45 U15.1
  Top Layer w0.6: J6.12 v2(54.6,38.5)
  MidLayer1 w0.25: v1(54,29.1) 54,29.7 56.5,32.2 56.5,36.6 v2(54.6,38.5) ; 56.5,34.7 v1(58.8,34.7)
  Bottom Layer w0.25: v1(58.8,34.7) 59.1,35 U13.36@61.375,35
M\C\S\_\P\R\: J6.4 U7.12 | length 21.4
  Top Layer w0.6: v2(51.8,42.5) J6.4
  MidLayer1 w0.3: v2(51.8,42.5) 54.7,42.5 58.6,46.4 64.8,46.4 65.4,45.8 65.4,43.365 v1(65,42.965)
  Bottom Layer w0.4: U7.12 v1(65,42.965)
MADC_BUSY: J6.8 U10.4 | length 10.5
  Top Layer w0.4: U10.4 v1@53.15,32.85
  Top Layer w0.6: v2(51.8,40.5) J6.8
  MidLayer1 w0.25: v2(51.8,40.5) 52.8,39.5 52.8,33.2 v1(53.1,32.9)
MAG_PULSE: J5.13 U5.10 | length 2.8
  Top Layer w0.2: U5.10@68.97,72.35 70.15,72.35 J5.13@71.3,73.5
MCU_SCK: J5.11 U5.11 | length 3
  Top Layer w0.2: U5.11@68.97,73 69.8,73 J5.11@71.3,74.5
MCU_SDI: J5.9 U5.12 | length 3.1
  Top Layer w0.2: U5.12@68.97,73.65 69.45,73.65 J5.9@71.3,75.5
MCU_SDO: J5.7 U5.13 | length 3.4
  Top Layer w0.2: U5.13@68.97,74.3 69.4,74.3 70.5,75.4 70.5,75.7 J5.7@71.3,76.5
MDRDY_PR: J6.15 U7.3 | length 11.7
  Top Layer w0.6: J6.15 v2(58.2,37)
  MidLayer1 w0.3: v2(58.2,37) 62.6,41.4 v1(62.6,42.1)
  Bottom Layer w0.2: U7.3@59.4,42.8 62,42.8 v1@62.5,42.3
MGND: C11.2 C12.1 C13.2 C15.2 C16.2 C18.2 C19.2 C20.2 C22.2 C23.2 C24.2 C25.2 C26.2 C27.2 C28.2 C29.2 C30.2 C31.2 C32.2 J6.2 J6.5 J6.10 J6.14 pad.0@76.25,36.5 Q2.1 R15.2 RT2.2 U7.0 U7.1 U7.4 U7.6 U7.8 U7.14 U7.15 U7.16 U8.2 U9.2 U10.1 U10.3 U11.1 U11.7 U11.11 U11.13 U11.15 U11.17 U12.4 U13.1 U13.3 U13.4 U13.5 U13.6 U13.7 U13.30 U13.31 U13.32 U13.33 U13.35 U13.39 U14.3 U14.5 U15.3 | length 147.6
  Top Layer w0.25: v2@61.5,32.5 C18.2@63.8,32.5
  Top Layer w0.28: v1(69.6,43.4) 70.5,43.4 70.65,43.25 73.55,43.25 R15.2@74.6,44.3
  Top Layer w0.3: U10.1 51.85,28.85 52.3,28.4 55.3,28.4 55.65,28.75 U15.3 ; 53.15,28.45 U10.3
  Top Layer w0.4: U10.3 53.15,30.45 v1(53.5,30.8)
  Top Layer w0.55: J6.5 U9.2 ; C15.2@61.5,29.4 U8.2 ; C18.2@64.493,33.093 C22.2@65.8,34.4
  Top Layer w0.6: 51,39.5 J6.10 ; v1(59.4,37.2) C13.2@59.4,37.7 ; C22.2@65.7,34.4 v4(65.7,35.1) ; v1(72.1,40.75) 72.1,40.2 72.5,39.8 75.3,39.8 76.5,41 v3(76.5,42.3) ; v3(72.4,36.8) 71.2,38 71.2,41.3 71.7,41.8 73.4,41.8 v4(75.4,43.8) R15.2@74.85,44.35 ; R15.2@75,44.2 v1(76.1,44.2)
  Top Layer w0.8: C22.2 67.562,34.35 68.412,35.2 v3(72.4,35.2) ; v3(72.4,33.8) v3(72.4,36.8)
  Top Layer w1: C13.2@59.5,39.1 v5(59.5,40)
  MidLayer1 w0.28: v1(59.7,31.5) 59.7,32.1 62.5,34.9 63.5,34.9 66.4,37.8 66.4,39.3 69.6,42.5 v1(69.6,43.4)
  MidLayer1 w0.4: v1(53.5,30.8) 53.9,31.2 J6.14@53.9,36.474
  MidLayer1 w0.6: v2(61.5,32.3) 61.9,32.3 63.2,33.6 v4(65,33.6) 65.7,34.3 v4(65.7,35.1)
  Bottom Layer w0.18: U11.1@71.8,44.225 71.8,43.825 U11.17@72.05,43.575
  Bottom Layer w0.2: U7.6 60.035,45.365 60.5,44.9 61,44.9 61.4,45.3 U7.0@61.4,46.1 ; v1@59.8,31.3 62.3,31.3 62.75,31.75 U13.30@62.75,31.875
  Bottom Layer w0.25: U12.4@59.975,32.8 61.375,32.8 ; U13.33@61.375,33.5 61.375,32.325 61.825,31.875 U13.31@62.25,31.875 ; U13.33@61.6,33.5 U13.39@63.1,33.5 ; U13.35@61.6,34.5 U13.39@62.8,34.5 ; U13.1@62.25,36.9 62.25,36.35 U13.39@62.7,35.9 ; U13.39@63.25,35.75 U13.3@63.25,36.9 ; U13.39@63.75,35.85 U13.4@63.75,36.9 ; U13.39@64.25,35.95 U13.5@64.25,36.9 ; U13.39@64.75,35.95 U13.6@64.75,36.9 ; U13.39@65.25,35.85 U13.7@65.25,36.9
  Bottom Layer w0.28: U11.13@70.985,42.25 70.65,42.25 70.5,42.1 70,42.1 69.6,42.5 69.6,43.2 69.8,43.4 70.5,43.4 70.65,43.25 U11.15@70.985,43.25 ; U11.15@71.175,43.25 U11.17@72.15,43.25 ; v1@72.25,40.9 U11.11@72.25,41.485 ; U11.17@72.75,42.75 U11.7@73.825,42.75 ; U11.7@74.015,42.75 RT2.2@74.95,42.75 ; v3(76.5,42.3) U14.3
  Bottom Layer w0.4: J6.2@53.9,44.526 54.374,45 55.55,45 C16.2 ; C26.2@65.7,40.8 66.6,39.9 67.95,39.9 C25.2 ; 67,45.645 Q2.1
  Bottom Layer w0.55: v3(58.8,45.4) 58.6,45.2 58.6,44.1 58.935,43.765 U7.4 ; v3@58.835,45.365 U7.6
  Bottom Layer w0.6: v1(59.4,37.2) C19.2@59.4,38.85 ; C20.2@66.5,46.1 v3(67,46.1) ; C25.2 69.35,38.5 71.6,38.5 72.35,37.75 C28.2 ; RT2.2@75.3,43.4 75.8,43.9 U14.5
  Bottom Layer w0.8: C24.2 66.325,29.975 C23.2@67.8,28.5 ; C23.2 71.3,28.5 72.35,29.55 C28.2
  other v2: 51.8,39.5 58.2,42
  other v3: 72.4,30.8 72.4,32.3 66.1,45.3
MMAG_PULSE: J6.13 Q2.2 Q2.4 | length 23.4
  Top Layer w0.6: J6.13 v2(58.2,38)
  MidLayer1 w0.3: v2(58.2,38) 57.5,37.3 57.5,36.6 57.8,36.3 59.5,36.3 66,42.8 v1(66.9,42.8)
  Bottom Layer w0.2: v1@66.9,42.9 v1(66.9,42.8) 67.6,42.1 68.2,42.1 68.6,42.5 68.6,43.4 69.475,44.275 Q2.4 69.475,45.725 69.2,46 68.4,46 68.175,45.775 Q2.2
MMCU_SCK: J6.11 U7.9 U13.38 | length 21.8
  Top Layer w0.6: J6.11 v2(58.2,39)
  MidLayer1 w0.3: v2(58.2,39) 57.2,40 57.2,42.1 58,42.9 59.2,42.9 61.9,45.6 v1(64.6,45.6)
  Bottom Layer w0.25: v2(58.2,39) 57.7,39 57.5,38.8 57.5,36.6 57.8,36.3 60.2,36.3 60.5,36 U13.38@61.375,36
  Bottom Layer w0.3: U7.9@63.8,45.4 64,45.6 v1(64.6,45.6)
MMCU_SDI: J6.9 U7.11 U15.4 | length 20.1
  Top Layer w0.4: U15.4 v1@55.65,32.85
  Top Layer w0.6: J6.9 v2(58.2,40)
  MidLayer1 w0.25: v2(55.4,40) 54.9,40 53.9,39 53.9,38.3 55.6,36.6 v1(55.6,32.9)
  MidLayer1 w0.3: v2(58.2,40) 61,42.8 63.6,42.8 v1(64.6,43.8)
  Bottom Layer w0.3: U7.11 v1@64.565,43.765
MMCU_SDO: J6.7 U7.10 U13.34 | length 21.9
  Top Layer w0.6: J6.7 v2(58.2,41)
  MidLayer1 w0.3: v2(58.2,41) 61.9,44.7 v1(64.6,44.7)
  Bottom Layer w0.25: v2(58.2,41) 57.7,41 57,40.3 57,35.2 58.2,34 U13.34@61.375,34
  Bottom Layer w0.3: U7.10@63.57,44.665 v1@64.565,44.665
MTRIG_PR: J6.6 U7.2 | length 15
  Top Layer w0.6: v2(51.8,41.5) J6.6
  Bottom Layer w0.2: U7.2@59.4,42 61.5,42 v1(61.7,42.1)
  Bottom Layer w0.25: v2(51.8,41.5) 54,41.5 54.9,42.4 54.9,44.3 55.1,44.5 57.4,44.5 58.6,43.3 58.6,42.6 58.9,42.3 U7.2@59.3,42.3
MVCC3V3: C16.1 J6.1 J6.3 R11.1 U8.1 U9.1 U9.3 U10.5 U15.5 | length 53.2
  Top Layer w0.25: U9.1@60.1,42.8 60.8,42.8 61,42.6 61,41.4 60.8,41.2 U9.3@60.2,41.2
  Top Layer w0.3: U10.5 51.85,32.85 52.7,33.7 v1(57.2,33.7) ; U15.5 54.35,33.65
  Top Layer w0.55: J6.3@55.8,43 59.1,43 59.15,42.95 U9.1 ; v1(57.2,30.4) v1(57.2,33.7) ; 57.2,32.6 59.8,32.6 60.55,31.85 U8.1
  Top Layer w0.6: v2(67.8,42.8) R11.1@68.35,42.8
  MidLayer1 w0.4: v1(57.2,30.4) 57.2,30.5 61.8,35.1 61.8,37.5 65.6,41.3 66.8,41.3 67.8,42.3 v2(67.8,42.8)
  Bottom Layer w0.6: C16.1@56.05,43.5 56.7,43.5 56.4,43.2 56.4,34.8 57.2,34 v1(57.2,33) ; v4(56.8,43.5) v2(57.5,43.5)
NetC1_1: C1.1 D1.2 L1.1 U1.3 | length 6.6
  Bottom Layer w0.25: U1.3 64,55 C1.1@64.5,54.5
  Bottom Layer w0.55: D1.2 L1.1@68.675,54.125
  Bottom Layer w1: C1.1 L1.1@68.15,54.05
NetC1_2: C1.2 U1.2 | length 1.2
  Bottom Layer w0.25: U1.2 C1.2@64.6,55.5
NetC3_2: C3.2 U2.4 | length 1.8
  Top Layer w0.55: C3.2@55.55,68.1 U2.4
NetC4_2: C4.2 D2.2 J2.1 U1.4 U1.5 | length 28.6
  Top Layer w0.6: D2.2@53,63.1 53.5,63.1 55,64.6 57.1,64.6 57.8,63.9 57.8,62.8 59.6,61 J2.1
  Top Layer w1: J2.1 62.69,60.31 64.8,58.2 64.8,54 v5(63.4,52.6)
  Bottom Layer w0.25: v5@63.2,53 63.2,54 U1.4@63.2,54.5
  Bottom Layer w0.4: v5@63.5,52.6 U1.5@63.5,53.9
  Bottom Layer w2: C4.2@59.2,61 J2.1
NetC6_2: C6.2 R2.1 | length 1.5
  Bottom Layer w0.6: C6.2 R2.1
NetC8_2: C8.2 U5.6 Y1.1 | length 8.5
  Top Layer w0.25: U5.6@67.3,70.03 67.3,69.6 67.9,69 70.2,69 Y1.1@72,67.2 ; C8.2 Y1.1@72.15,66.4
NetC9_2: C9.2 R9.2 Y1.2 | length 3.7
  Top Layer w0.25: R9.2@75.6,68.8 76,68.4 Y1.2@76,67.3 ; C9.2 Y1.2@77.35,66.05
NetC12_2: C12.2 U7.7
  other v4: 60.8,45.7
NetC14_2: C14.2 U9.4 | length 1.3
  Top Layer w0.55: U9.4 C14.2@63.4,41.05
NetC17_1: C17.1 U8.6 | length 1.6
  Top Layer w0.55: C17.1@60.2,35 60.55,34.65 U8.6
NetC17_2: C17.2 U8.5 | length 1.8
  Top Layer w0.55: U8.5 61.5,34.7 C17.2@62,35.2
NetC18_1: C18.1 U8.4 | length 1.5
  Top Layer w0.55: U8.4@62.45,33.65 C18.1@63.5,34.7
NetC19_1: C19.1 R10.1 U7.13 | length 8.4
  Top Layer w0.55: v2(66.5,42) R10.1@66.6,41.7
  Bottom Layer w0.5: C19.1@61.4,39.5 63.8,39.5 64.5,40.2 64.5,41.9
  Bottom Layer w0.55: U7.13 64.435,42.165 64.6,42 v2(66.5,42)
NetC20_1: C20.1 Q2.3 R11.2 | length 4.6
  Top Layer w0.6: v1(67.5,43.8) 67.6,43.8 R11.2@68.3,44.5
  Bottom Layer w0.37: v1(67.5,43.8) 68.1,43.8 68.825,44.525 Q2.3
  Bottom Layer w0.6: C20.1@66.2,43.8 v1(67.5,43.8)
NetC21_1: C21.1 U11.8 U14.2 | length 6.9
  Bottom Layer w0.28: 74.015,41.515 U11.8@74.015,42.25
  Bottom Layer w0.5: C21.1@72.4,39.7 73.2,39.7 74.1,40.6 74.1,41.5 U14.2
NetC21_2: C21.2 Q2.5 Q2.6 Q2.7 Q2.8 | length 3.7
  Bottom Layer w0.38: Q2.8 Q2.5 69.475,40.625 70.3,39.8 C21.2@70.6,39.8
NetC23_1: C23.1 R12.1 U13.25 | length 5.1
  Bottom Layer w0.25: R12.1 C23.1 ; U13.25@65.25,31.875 65.25,31.05 65.475,30.825 C23.1@65.475,28.675
NetC24_1: C24.1 R13.1 U13.26 | length 3.1
  Bottom Layer w0.25: R13.1 C24.1 ; U13.26@64.75,31.875 64.75,31.475 64.825,31.4 C24.1@64.825,30.1
NetC25_1: C25.1 U11.14 U13.10 | length 8.6
  MidLayer1 w0.28: v3(67.1,38.4) 67.1,39.2 70.25,42.35 v1(70.25,42.75)
  Bottom Layer w0.25: U13.10@66.75,37.125 C25.1@66.75,38.85
  Bottom Layer w0.28: v1(70.25,42.75) U11.14@70.985,42.75
  Bottom Layer w0.6: C25.1@67,38.85 v3(67.1,38.4)
NetC26_1: C26.1 U11.3 U13.9 | length 13.9
  MidLayer1 w0.28: v3(65.7,38.4) 65.7,39.4 68.9,42.6 68.9,43.7 69.85,44.65 70.85,44.65 v1(71,44.8)
  Bottom Layer w0.25: C26.1@65.5,38.8 66.25,38.05 U13.9@66.25,37.125
  Bottom Layer w0.28: v1(71,44.8) 71.2,45 72.6,45 72.75,44.85 U11.3@72.75,44.515
  Bottom Layer w0.6: C26.1@65.4,38.8 v3(65.7,38.4)
NetC27_1: C27.1 U11.10 U13.14 | length 9.5
  MidLayer1 w0.28: v3(69.9,36.4) 69.9,37.5 v1(73.15,40.75)
  Bottom Layer w0.25: U13.14@68.625,35.5 69,35.5 v3(69.9,36.4) ; 69.6,36 C27.1@70.3,36
  Bottom Layer w0.28: U11.10@72.75,41.485 72.75,41.15 v1(73.15,40.75)
  Bottom Layer w0.6: v3(69.9,36.4) C27.1@70.3,36
NetC28_1: C28.1 U11.16 U13.13 | length 11.7
  MidLayer1 w0.25: v1(68.6,37.6) 68.6,39.9 70.9,42.2 70.9,43.8 v3(70.7,44)
  Bottom Layer w0.25: v1(68.6,37.6) C28.1@70.55,37.6 ; U13.13@68.625,36 v1@68.625,37.575 ; v3(70.7,44) 70.7,44.035 U11.16@70.985,43.75
  Bottom Layer w0.28: v3@70.7,43.9 70.85,43.75 U11.16@70.985,43.75
NetC29_1: C29.1 U13.18 U14.4 | length 18
  MidLayer1 w0.3: v3(69.9,33.2) 70.1,33 72.9,33 73.8,33.9 73.8,37.8 75.6,39.6 75.6,42.5 v1(76.2,43.1)
  Bottom Layer w0.25: U13.18@68.625,33.5 70,33.5 C29.1@70.3,33.2
  Bottom Layer w0.6: v3(69.9,33.2) C29.1@70.5,33.2 ; v1(76.2,43.1) U14.4
NetC30_1: C30.1 U13.17 U14.7 | length 19.1
  MidLayer1 w0.3: v3(69.9,34.3) 70.1,34.5 72.8,34.5 73.3,35 73.3,38 75,39.7 75,42.625 74.7,42.925 74.7,44.1 75.2,44.6 75.6,44.6 v3(76.5,45.5)
  Bottom Layer w0.25: U13.17@68.625,34 70,34 C30.1@70.4,34.4
  Bottom Layer w0.6: v3(69.9,34.3) C30.1@70.3,34.3 ; v3(76.5,45.5) U14.7
NetC31_1: C31.1 R15.1 RT1.2 U13.21 | length 31.5
  Top Layer w0.3: v1@70.4,45.5 72.1,45.5 R15.1@72.9,44.7
  MidLayer1 w0.3: v3(69.9,31.7) 69.4,31.7 68.6,32.5 68.6,34.8 69.4,35.6 70.2,35.6 70.7,36.1 70.7,36.9 73.9,40.1 73.9,42.1 73.6,42.4 73.6,44.6 74.5,45.5 74.5,46.1 74.2,46.4 72.7,46.4 71.8,45.5 v1@70.4,45.5
  Bottom Layer w0.25: U13.21@67.25,31.875 67.25,31.65 67.5,31.4 C31.1@70.55,31.4
  Bottom Layer w0.3: v1(70.4,45.4) 70.7,45.7 RT1.2@71.7,45.7
  Bottom Layer w0.6: v3(69.9,31.7) C31.1@70.5,31.7
NetC32_1: C32.1 R14.2 RT2.1 U13.22 | length 26.8
  Top Layer w0.6: R14.2@75,46 v4(75.5,45.5)
  MidLayer1 w0.3: v3(69.9,30.2) 70.7,31 70.7,32.1 70.4,32.4 69.5,32.4 69.1,32.8 69.1,34.6 69.6,35.1 70.4,35.1 71.2,35.9 71.2,36.7 74.4,39.9 74.4,42.3 74.1,42.6 74.1,44.3 75.3,45.5 v4(75.5,45.5)
  Bottom Layer w0.25: U13.22@66.75,31.875 66.75,31.45 67.3,30.9 69.6,30.9 C32.1@70.3,30.2
  Bottom Layer w0.6: v3(69.9,30.2) C32.1@70.45,30.2 ; RT2.1@75,45 v4(75.5,45.5)
NetD2_1: D2.1 J3.1 Q1.2 | length 39.7
  Top Layer w0.25: Q1.2 72.5,85.3 72.8,85 v1(73.7,85)
  Top Layer w0.5: D2.1@53,59.9 53.9,59 J3.1
  MidLayer1 w0.3: v2(53.4,60.9) 53.4,62.2 56,64.8 56,72.6 65.1,81.7 70.3,81.7 73.6,85 v1(73.7,85)
NetJ1_2: J1.2 U3.16 | length 7.8
  Top Layer w0.6: v1(60.1,80.9) 60.1,80 60.7,79.4 61.7,79.4 62.5,80.2 J1.2
  Bottom Layer w0.8: v1@60.05,80.25 U3.16
  other v1: 60.1,80.2
NetJ2_2: J2.2 R7.1 U4.7 | length 8.7
  Top Layer w0.6: R7.1@60.6,64.4 60.9,64.4 61.865,65.365 64.235,65.365 64.5,65.1 64.5,61.1 J2.2@64.7,60.9
NetJ2_3: J2.3 R7.2 U4.6 | length 10.3
  Top Layer w0.6: R7.2@60.8,66.635 64.265,66.635 65.4,65.5 65.4,63.7 J2.3@67.8,61.3
NetJ3_2: J3.2 U6.4 | length 1.8
  Top Layer w0.3: J3.2@54.8,58.6 U6.4@54.8,60.4
NetJ3_3: J3.3 U6.6 | length 2.4
  Top Layer w0.3: J3.3@55.6,58.4 55.6,59.2 56.15,59.75 U6.6
NetLD1_2: LD1.2 LD1.3 R1.2 | length 5.7
  Top Layer w0.6: R1.2@51.5,62 v2(52,62.5)
  Bottom Layer w0.6: v2(52,62.5) 51.1,61.6 LD1.3 LD1.2
NetQ1_5: Q1.5 Q1.6 | length 0.5
  Top Layer w0.25: Q1.5 Q1.6
NetR2_2: R2.2 U1.9 | length 9.7
  Bottom Layer w0.25: R2.2@55.4,54.2 55,54.6 55,57.2 55.3,57.5 56.9,57.5 58.9,55.5 U1.9
NetR3_2: R3.2 R5.2 U1.8 | length 6.9
  Bottom Layer w0.25: R3.2 56,55 56.8,54.2 R5.2@56.8,54.1 ; R5.2@56.9,54.2 59,54.2 59.8,55 U1.8
NetR4_2: R4.2 U1.10 | length 0.8
  Bottom Layer w0.4: U1.10@60.6,56.1 60.6,56.6 R4.2@60.8,56.8
NetR9_1: R9.1 U5.7 | length 6.1
  Top Layer w0.25: U5.7@67.95,70.03 68.28,69.7 70.4,69.7 71.1,69 R9.1
NetR12_2: R12.2 U12.6 U12.7 | length 3.9
  Bottom Layer w0.25: U12.6@59.4,28.8 59.4,29.2 59.6,29.4 60.4,29.4 60.7,29.1 61.7,29.1 R12.2@62,28.8
  Bottom Layer w0.4: U12.7@58.7,28.8 U12.6@59.3,28.8
NetR13_2: R13.2 U12.1 U12.2 | length 5.8
  Bottom Layer w0.25: 58.25,32.2 58.25,30.55 58.9,29.9 R13.2@61.6,29.9
  Bottom Layer w0.4: U12.1@58.1,32.2 U12.2@58.6,32.2
NetU3_3: U3.3 U5.15 | length 15.3
  Top Layer w0.37: U5.15@67.95,75.97 68.67,75.97 69.2,76.5 v1(70.1,76.5)
  Bottom Layer w0.3: v1(70.1,76.5) 70.7,75.9 70.7,75.4 73.2,72.9 73.2,67.3 73.75,66.75 U3.3
NetU3_4: U3.4 U5.14 | length 12.7
  Top Layer w0.37: U5.14@68.97,74.95 v1(69.654,75.634)
  Bottom Layer w0.3: v1(69.654,75.634) 72.65,72.638 U3.4
NetU3_12: U3.12 U5.1 | length 7
  Top Layer w0.37: v1@61.6,68.7 62.2,69.3 63.6,69.3 64.05,69.75 U5.1@64.05,70.03
  Bottom Layer w0.3: U3.12 61.15,68.25 v1@61.6,68.7
  other v1: 61.7,68.8
NetU3_25: U3.25 U6.3 | length 32.7
  Top Layer w0.35: U6.3 54.85,63.35 55.1,63.6 v1(55.8,63.6)
  MidLayer1 w0.3: v1(55.8,63.6) 56.5,64.3 56.5,72.4 65.3,81.2 70.7,81.2 v3(72.6,83.1)
  Bottom Layer w0.6: U3.25@72.6,81.95 v3(72.6,83.1)
NetU3_26: U3.26 U6.1 | length 32.1
  Top Layer w0.35: U6.1 56.15,62.75 v1@56.9,63.5
  MidLayer1 w0.3: v1(56.8,63.6) 57,63.8 57,72.2 65.5,80.7 71.3,80.7 v3(73.7,83.1)
  Bottom Layer w0.6: U3.26@73.7,82.3 v3(73.7,83.1)
NetU3_28: U3.28 U5.8 U5.19 | length 27.1
  Top Layer w0.2: U5.19@65.35,75.97 65.35,78.25 v1(65.9,78.8)
  Top Layer w0.37: U5.8@68.97,71.05 69.55,71.05 v1(69.8,70.8)
  Bottom Layer w0.3: v1(69.8,70.8) 69.8,72.8 66,76.6 66,79 66.8,79.8 73.8,79.8 74.7,78.9 75.6,78.9 76.2,79.5 U3.28@76.2,81.7
NetU12_3: U12.3 U13.27 | length 9.4
  MidLayer1 w0.25: v1(58.9,31) 58.9,30.4 59.4,29.9 60.3,29.9 62.1,31.7 63.6,31.7 64.2,31.1 v1(64.2,31)
  Bottom Layer w0.25: v1(58.9,31) 58.9,31.6 U12.3@59.4,32.1 ; v1(64.2,31) 64.25,31.15 U13.27@64.25,31.875
NetU12_5: U12.5 U13.24 | length 8.2
  MidLayer1 w0.25: v3(60.4,28.2) 62.3,30.1 65.2,30.1 v1(66.1,31)
  Bottom Layer w0.25: U13.24@65.75,31.875 65.75,31.35 v1(66.1,31)
  Bottom Layer w0.6: U12.5@60.1,28.2 v3(60.4,28.2)
PGC: J4.4 U5.24 | length 12.7
  Top Layer w0.2: J4.4 54.35,79.75 56.3,77.8 58.5,77.8 62.2,74.1 62.2,73.9 62.45,73.65 U5.24@63.03,73.65
PGD: J4.3 U5.25 | length 12.7
  Top Layer w0.2: J4.3 55,78.5 56.1,77.4 58.3,77.4 61.8,73.9 61.8,73.3 62.1,73 U5.25@63.03,73
TRIG_PR: J5.6 U5.2 | length 18.1
  Top Layer w0.37: v1(64.7,69.3) U5.2@64.7,70.275
  Top Layer w0.6: J5.6 v2(77.2,77)
  MidLayer1 w0.3: v1(64.7,69.3) 65.1,69.3 68,72.2 72.4,72.2 v2(77.2,77)
VCC3V: C2.1 C3.1 U2.5 U3.6 | length 17.9
  Top Layer w0.55: C3.1@57.45,68.1 U2.5
  Bottom Layer w0.6: v1(58.6,70.3) 58.6,70 61.7,70 62.725,68.975 62.725,68.175 64.2,66.7 70.1,66.7 70.45,66.35 U3.6
  Bottom Layer w0.65: v1(58.6,69.6) v1(58.6,70.3)
VCC3V3: C5.2 C7.1 C10.1 J4.1 J5.1 J5.3 L1.2 Q1.4 R3.1 R8.2 U1.1 U2.1 U2.3 U3.5 U4.3 U5.17 | length 87.6
  Top Layer w0.37: U5.17@66.65,75.97 66.65,77 C10.1
  Top Layer w0.4: v1(57,60.1) 60.5,60.1 v1(63.7,56.9) ; 70,79 70,82.3 Q1.4@71.9,84.2
  Top Layer w0.55: J4.1@53.1,75.9 R8.2@54.4,75.9 ; U2.3 v1@55.55,73.05
  Top Layer w0.6: C10.1@67.2,77.8 68.1,78.7 72.08,78.7 J5.3 ; U4.3 C7.1@70.165,66.635 ; C7.1 v1(70,68.3)
  Bottom Layer w0.25: U1.1@63.5,56 U1.1@63.5,56.1
  Bottom Layer w0.4: R3.1 56.15,58.35 57,59.2 v1(57,60.1) ; U1.1@63.5,56.1 63.5,56.5 C5.2@65.1,58.1
  Bottom Layer w0.6: J4.1 54.3,76 55.5,74.8 v1(55.5,73.1) 56,72.6 62.2,72.6 63.7,71.1 63.7,68.6 64.7,67.6 v2(70,67.6) ; v1(58.1,71.7) v1(58.1,72.4) ; v2(66.7,77) 68.7,77 ; 67.6,77 v2(67.6,78.1) 68.861,78.1 ; 68.1,77 68.1,78.1
  Bottom Layer w0.8: 70.6,68.3 v1(70,68.3) v2(70,67.6) 70.7,67.6 ; v2(70.8,78.5) 69.3,78.5 68.7,77.9 68.7,75.1 70.7,73.1 70.7,67.6 ; 71.55,63.15 71.55,66.75 70.7,67.6
  Bottom Layer w0.85: L1.2@71.3,58.5 71.8,59 ; 71.55,63.15 72.2,62.5 72.2,59.4 71.8,59 ; L1.2@71.8,58 71.8,59
  other v1: 70.1,78.5
VDDUSB: Q1.3 R6.2 U3.24 | length 5
  Top Layer w0.25: v1(71.6,85.3) R6.2@71.6,86.95
  Bottom Layer w0.5: U3.24@71.6,81.95 v1(71.6,85.3)
pads on no net: J3.4 U1.7 U3.1 U3.2 U3.8 U3.9 U3.10 U3.18 U3.20 U3.21 U3.22 U3.23 U3.27 U5.4 U6.5 U11.2 U11.5 U11.6 U11.9 U11.12 U13.8 U13.11 U13.12 U13.15 U13.16 U13.19 U13.20 U13.23 U14.1 U14.6

## Polygon pours and split planes (outlines as drawn)
MGND on Top Layer "Top Layer-MGND" (solid, remove dead copper, pour order 1004): 78.5,47 78.5,42.9 76,42.9 76,41.2 75.1,40.3 72.7,40.3 72.6,40.4 72.6,41 72.4,41.2 71.8,41.2 71.6,41 71.6,39.9 72.3,39.2 73.7,39.2 74,38.9 74,27.5 66.3,27.5 66.3,30.4 63,30.4 63,27.5 57.7,27.5 57.7,31 61.1,31 61.1,32.9 63.3,32.9 63.3,39.2 64.3,40.2 69,40.2 69.2,40.4 69.2,47
MGND on Top Layer "Top Layer-MGND 2" (solid, remove dead copper, pour order 1006): 50.5,47 68.5,47 68.5,41 65.5,41 62.5,38 62.5,36.5 60,36.5 57.1,33.6 52.7,33.6 51.8,32.7 51.8,31.3 57.1,31.3 57.1,27.5 50.5,27.5 50.5,37.8 54.4,37.8 54.4,36.5 57.3,36.5 58,36.5 58.6,37.3 58.6,43.2 50.5,43.2
GND on Top Layer "Top Layer-GND 2" (solid, remove dead copper, pour order 1002): 50.5,60.5 52,60.5 52,59 53,58 53,56.5 57.1,56.5 57.1,59 68.5,59 69.5,60 69.5,63 73,63 74,64 76,64 76,63 78.5,63 78.5,56 74.5,56 73,54.5 73,50.5 50.5,50.5 50.5,51
GND on Top Layer "Top Layer-GND" (solid, remove dead copper, pour order 1000): 54,83 54,79.5 56,77.5 58.5,77.5 59.5,76.5 62.5,76.5 65.5,79.5 69.5,79.5 69.5,83 63.5,83 63.5,80 62,78.5 60,78.5 59,79.5 59,80.8 59.7,81.5 59.7,83
GND on Top Layer "Top Layer-GND 1" (solid, remove dead copper, pour order 1001): 53.5,83 53.5,79.5 56,77 58.5,77 61,74.5 61,73.8 60.2,73.8 58.3,75.7 56.3,75.7 56,75.4 56,73.7 54.9,73.7 54.9,64.5 53.6,63.2 50.5,63.2 50.5,83
GND on Top Layer "Top Layer-GND 3" (solid, remove dead copper, pour order 1003): 70.5,89.5 78.5,89.5 78.5,70.1 76.4,70.1 76.4,73.3 77.6,73.3 77.6,78.7 76.4,78.7 76.4,80.5 70.5,80.5
MGND on Top Layer "Top Layer-MGND 1" (solid, remove dead copper, pour order 1005): 78.5,42.5 76.5,42.5 76.5,41 75.5,40 74.5,40 74.5,27.5 78.5,27.5
MGND on Top Layer "Top Layer-MGND 3" (solid, remove dead copper, pour order 1007): 50.5,45.7 50.5,37.5 51.2,37.5 51.2,43.5 54.7,43.5 54.7,45.7
GND on MidLayer1 "MidLayer1-GND 1" (solid, remove dead copper, pour order 1009): 71,89 78,89 78,56.2 74.5,56.2 72.8,54.5 72.8,51 51,51 51,72.5 52,73.5 57,73.5 65.2,81.7 71,81.7
GND on MidLayer1 "MidLayer1-GND" (solid, remove dead copper, pour order 1008): 54,82.5 64,82.5 64,81.5 56.5,74 54,74 53.5,74.5 51,74.5 51,80 54,80
GND on Bottom Layer "Bottom Layer-GND 2" (solid, remove dead copper, pour order 1012): 50.5,50.5 67,50.5 67,52.1 64.6,52.1 62.8,53.9 61.3,53.9 61.3,54.1 60.1,54.1 60.1,55.6 61,56.5 64.1,56.5 64.1,59.1 57.3,59.1 57.3,62.7 54.7,62.7 54.7,75.4 53.7,76.4 53.7,82.8 50.5,82.8 50.5,51
GND on Bottom Layer "Bottom Layer-GND 1" (solid, remove dead copper, pour order 1011): 73.4,56 73.4,59.9 71.6,61.7 71.6,67.5 64.9,67.5 64.5,67.9 64.5,78.5 66.9,80.9 66.9,82.8 70.5,82.8 70.5,89.5 78.5,89.5 78.5,56
GND on Bottom Layer "Bottom Layer-GND" (solid, remove dead copper, pour order 1010): 54,82.8 66.5,82.8 66.5,81 64.1,78.6 64.1,68.4 66.5,66 69.5,66 69.5,64 71,62.5 71,60.5 69.5,60.5 69.5,61.5 68.5,62.5 60.6,62.5 59.6,63.5 57.7,63.5 57.1,64.1 55,64.1 55,73 54,74
MGND on Bottom Layer "Bottom Layer-MGND" (solid, remove dead copper, pour order 1013): 78.5,40 78.5,27.5 74.5,27.5 74.5,40
MGND on Bottom Layer "Bottom Layer-MGND 1" (solid, remove dead copper, pour order 1014): 67.7,47 50.5,47 50.5,27.5 57,27.5 57,43.5 59,43.5 59,43.9 58.8,43.9 58.8,45.1 60.2,45.1 60.5,44.8 62.8,44.8 62.8,46.1 65.3,46.1 65.3,45.3 66.7,45.3 67.7,45.3
GND on GroundPlane (split plane): 78.353,56.897 75.75,56.897 75.74,56.895 75.18,56.851 74.623,56.718 74.095,56.499 73.607,56.2 73.172,55.828 72.8,55.393 72.501,54.905 72.282,54.377 72.149,53.82 72.105,53.26 72.103,53.25 72.103,50.647 51,50.647 50.983,50.644 50.863,50.668 50.746,50.746 50.668,50.863 50.644,50.983 50.647,51 50.647,74.138 53.633,74.138 54.938,72.833 54.938,69 54.985,68.885 62.435,61.435 62.55,61.388 62.665,61.435 62.712,61.55 62.665,61.665 55.262,69.067 55.262,72.9 55.215,73.015 53.815,74.415 53.7,74.462 50.647,74.462 50.647,82.853 66.338,82.853 66.338,80.867 64.085,78.615 64.038,78.5 64.038,68 64.085,67.885 65.585,66.385 65.7,66.338 68,66.338 68.115,66.385 68.162,66.5 68.115,66.615 68,66.662 65.767,66.662 64.362,68.067 64.362,78.433 66.615,80.685 66.662,80.8 66.662,82.853 70,82.853 70.248,82.902 70.458,83.042 70.598,83.252 70.647,83.5 70.647,89.353 78.353,89.353
GND on GroundPlane (split plane): 53.638,80.562 52.362,80.562 52.362,81.438 53.638,81.438
GND on GroundPlane (split plane): 78.137,108.332 78.254,108.254 78.332,108.137 78.356,108.017 78.353,108 78.353,90.647 70,90.647 69.752,90.598 69.542,90.458 69.402,90.248 69.353,90 69.353,84.147 50.647,84.147 50.647,102.103 53.25,102.103 53.26,102.105 53.82,102.149 54.377,102.282 54.905,102.501 55.393,102.8 55.828,103.172 56.2,103.607 56.499,104.095 56.718,104.623 56.851,105.18 56.895,105.74 56.897,105.75 56.897,108.353 78,108.353 78.017,108.356

## Keep-outs
MidLayer1:
  lines w0.696: 72.25,50 72.25,53.25 cw(c75.75,53.25) 75.75,56.75 79,56.75
Keep-Out Layer:
  lines w0.696: 58.9,83.5 50,83.5 50,51 ccw(c51,51) 51,50 72.75,50 72.75,53.25 cw(c75.75,53.25) 75.75,56.25 79,56.25 79,90 70,90 70,83.5 66.1,83.5 ; 50,27 50,47.5 79,47.5 79,27 50,27

## Other copper
Top Layer:
  region net MVCC3V3: 58,44.3 55.5,44.3 55.5,42.7 58,42.7
  region net AVCC3V: 62.6,45.1 61.4,45.1 61.4,42.7 62.6,42.7
  region net AVCC5V: 63.6,32 62.2,32 62.2,30.7 63.6,30.7
  region net MGND: 54.5,46.4 52,46.4 52,43.2 54.5,43.2
  region net MGND: 60.2,46.4 54.2,46.4 54.2,44.8 60.2,44.8
  rectangle net VDDUSB: 71.5,85.3 72.1,86.1
  rectangle net GND: 74.5,70.1 77,73.3
  rectangle net GND: 74.5,78.7 77,86.4
  rectangle net VCC3V3: 70.1,78.2 73.5,79.8
  rectangle net GND: 59.5,81.4 61.6,83.5
  rectangle net GND: 63.4,79.9 65.5,83.5
  rectangle net VCC3V3: 57.2,71.3 58.4,73
  rectangle net VCC3V: 57.6,69 61.1,70.6
  rectangle net GND: 51,51.4 60,56.7
  rectangle net MGND: 52,34.6 54.5,37.8
Bottom Layer:
  region net MGND: 62.6,46.6 61.3,46.6 61.3,45.5 62.6,45.5
  region net MGND: 60.2,41.6 59.1,41.6 59.1,38.3 60.2,38.3
  region net MGND: 63.9,41.6 59.1,41.6 59.1,40.5 63.9,40.5
  rectangle net GND: 60.5,58.3 62.5,59.4
  rectangle net VCC3V3: 64.6,57.5 67.7,59.1
GroundPlane (plane layer: these items are gaps in the copper):
  lines w0.3: 50,74.3 53.7,74.3 55.1,72.9 55.1,69 62.55,61.55 ; 56.7,43.1 60.2,43.1 61.8,41.5 67.4,41.5 69.1,39.8 72.4,39.8 72.8,40.2 72.8,41.1 72.3,41.6 69.6,41.6 69.1,42.1 69.1,47.5 ; 57.5,27 57.5,33.9 ; 66.5,83.5 66.5,80.8 64.2,78.5 64.2,68 65.7,66.5 68,66.5 ; 69.1,42.9 69.1,43.9 ; 79,34.3 75.3,34.3 74.1,35.5 74.1,37.5 75.2,38.6 79,38.6 ; 52.2,80.4 53.8,80.4 53.8,81.6 52.2,81.6 52.2,80.4 ; 59.2,31 59.2,32 60.2,32 60.2,31 59.2,31 ; 76,41.8 76,42.8 77,42.8 77,41.8 76,41.8
  lines w1.27: 50,47.5 50,27 79,27 79,47.5 50.1,47.5 ; 50,51 ccw(c51,51) 51,50 72.75,50 72.75,53.25 cw(c75.75,53.25) 75.75,56.25 79,56.25 79,90 70,90 70,83.5 50,83.5 50,51

## Silkscreen, mask and mechanical layers (free items; w line width, h text height)
Top Overlay:
  text "GPS 1.0" at 74.4,57 h1 r90
  text "Emanuel" at 75.9,57 h1 r90
  text "Stingu" at 77.4,57 h1 r90
  text "GPS 1.0" at 76,27.8 h1 r90
  text "P&M" at 77.6,27.8 h1 r90
Mechanical 16:
  lines w0.2: 50,27 79,27 79,47.5 50,47.5 50,27 ; 50,51 ccw(c51,51) 51,50 72.75,50 72.75,53.25 cw(c75.75,53.25) 75.75,56.25 79,56.25 79,108 ccw(c78,108) 78,109 56.25,109 56.25,105.75 cw(c53.25,105.75) 53.25,102.75 50,102.75 50,51

## Text inside footprints (layer, text, board x,y; h text height)
U11: Bottom Overlay "A" at 73.1,40.6 h0.8 r90; Bottom Overlay "B" at 74.9,43.6 h0.8 r180